# Altium PCB MainBlock.PcbDoc (part 1 of 2)
Units mm, origin at the board's own origin, x right, y up, seen from the top; angles counter-clockwise.
Board outline 152.4 x 101.6 mm, 2 copper layers (Top Layer, Bottom Layer); 89 components, 179 nets, 467 pads, 175 vias.
Unrouted connection lines stored in the file: 9.
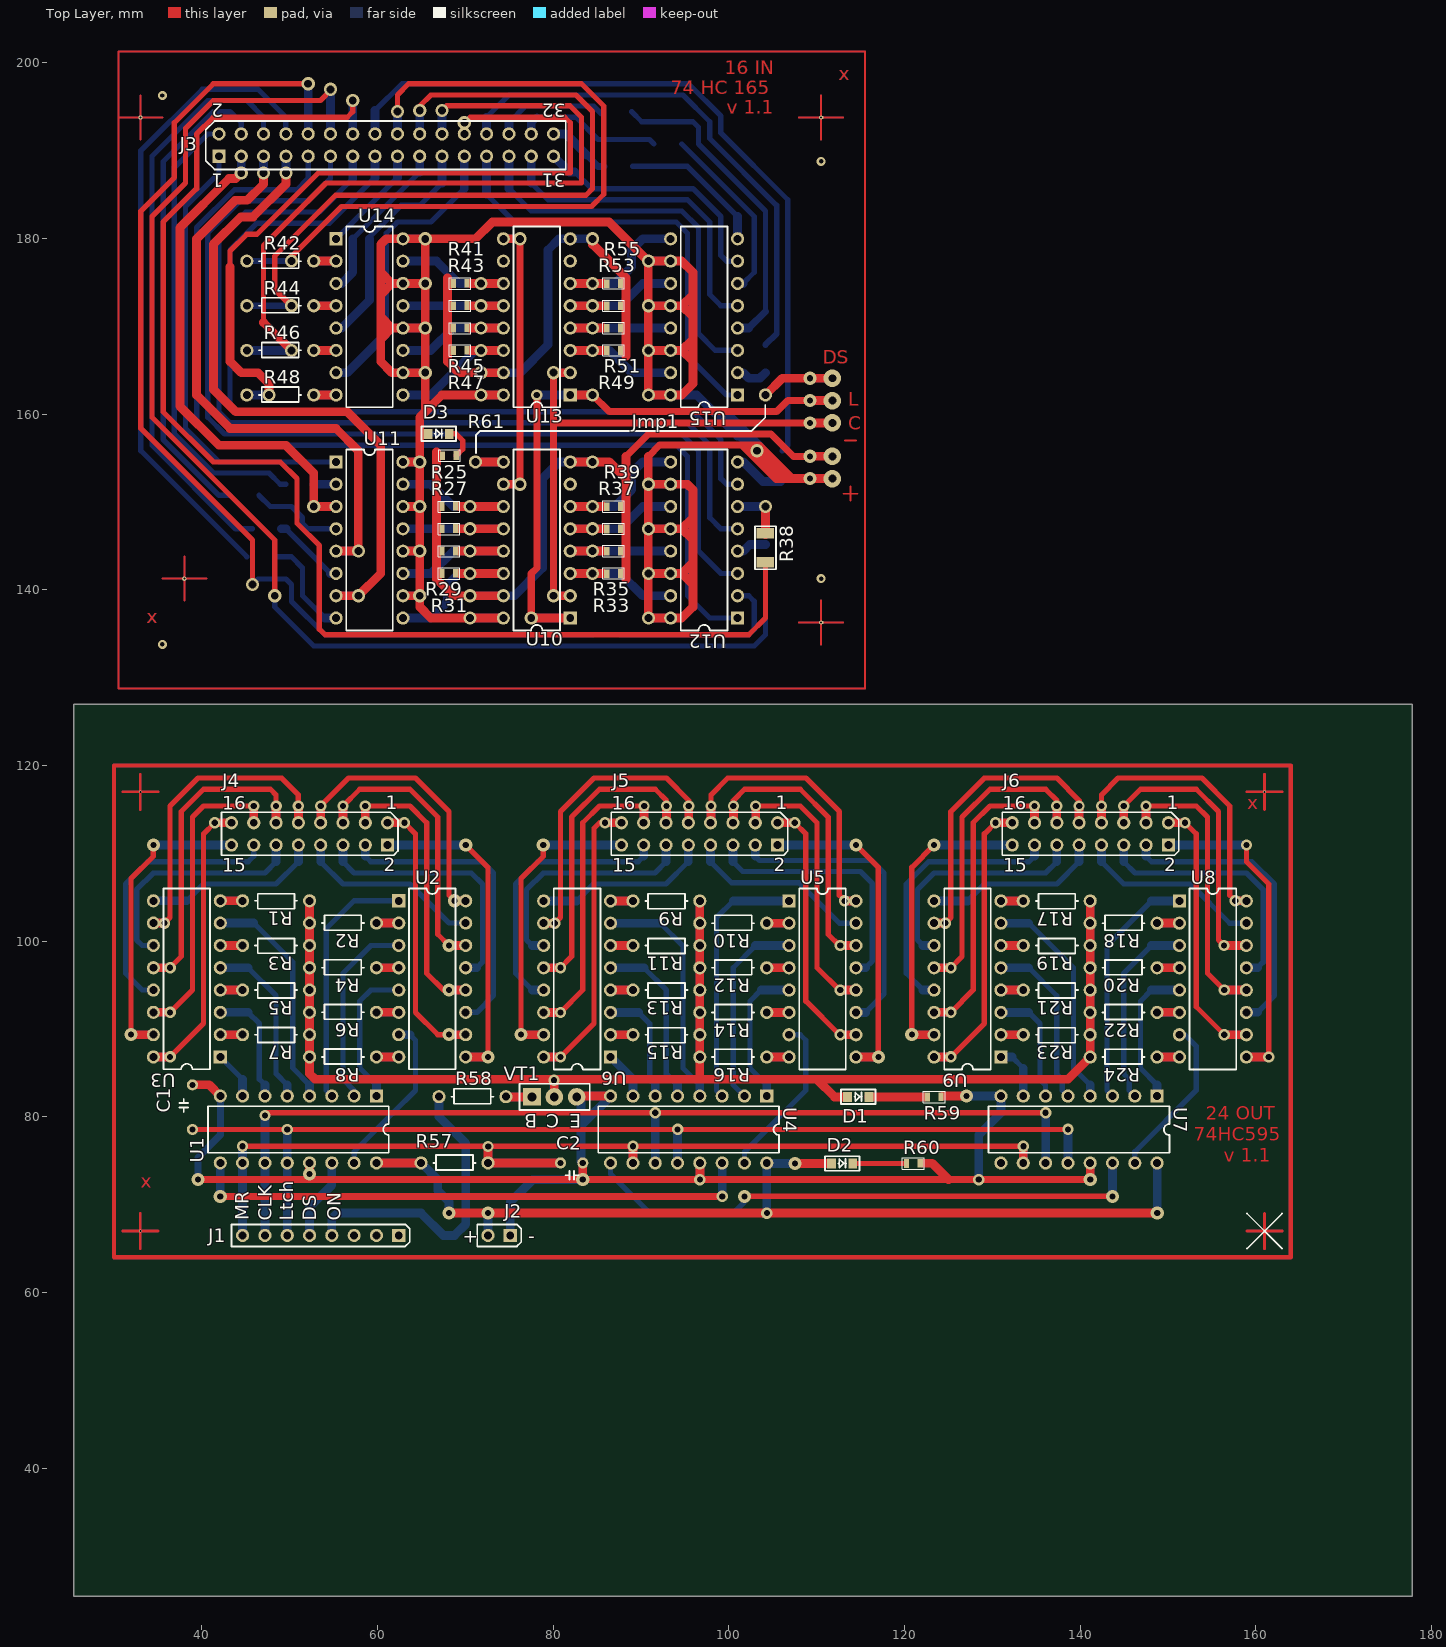
[diagram p0: Top Layer view]
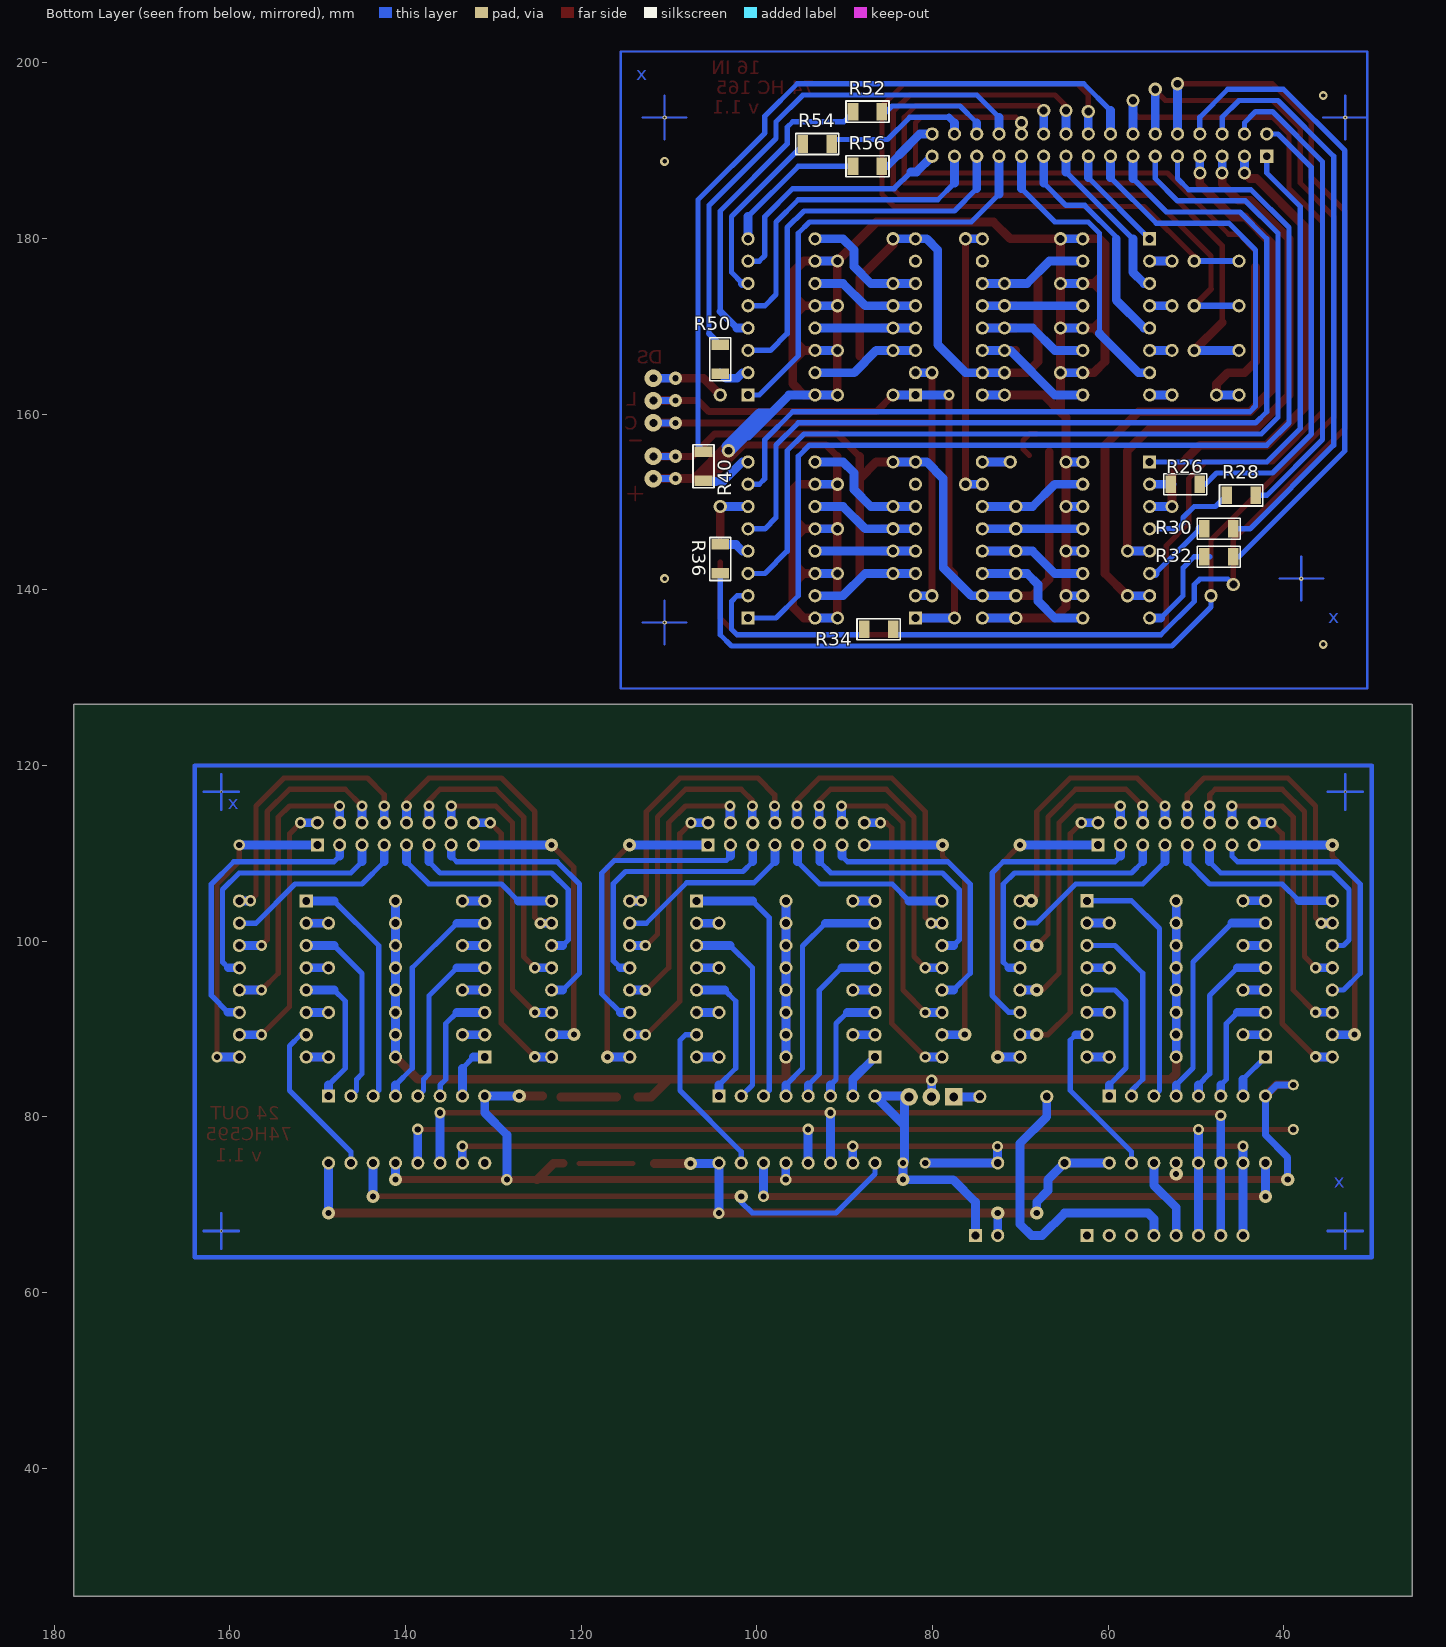
[diagram p1: Bottom Layer view, seen from below]

## Layer stack, top to bottom
Top Solder: solder mask 0.0102, Solder Resist, Dk 3.5
Top Layer: signal copper 0.0356
Dielectric 1: dielectric 0.32, FR-4, Dk 4.8
Bottom Layer: signal copper 0.0356
Bottom Solder: solder mask 0.0102, Solder Resist, Dk 3.5

## Board outline
25.4,25.4 177.8,25.4 177.8,127 25.4,127

## Design rules (kind name [scope] priority, off if disabled: settings)
Clearance [All] p1: gap=0.254
PolygonConnect [All] p1: connectstyle=Relief reliefconductorwidth=0.254 reliefentries=4 polygonreliefangle="90 Angle" airgapwidth=0.254
RoutingVias [All] p1: holewidth=0.9 width=1.5 viastyle="Through Hole" minholewidth=0.9 minwidth=1.5 maxholewidth=0.9 maxwidth=1.5
SilkToSilkClearance [All] p1: silktosilkclearance=0.1
SolderMaskExpansion [All] p1: expansion=0.12
Width [All] p1: maxlimit=1 minlimit=0.6 preferedwidth=1 minimp=50.000000 maximp=50.000000 favimp=50.000000
28 further rules are at their usual default settings.

## Classes and differential pairs
component class MainBlock: C1 C2 D1 D2 J1 J2 J4 J5 J6 R1 R2 R3 R4 R5 R6 R7 R8 R9 R10 R11 R12 R13 R14 R15 R16 R17 R18 R19 R20 R21 R22 R23 R24 R57 R58 R59 R60 U1 U2 U3 U4 U5 U6 U7 U8 U9 VT1
component class Inputs: D3 J3 Jmp1 R25 R26 R27 R28 R29 R30 R31 R32 R33 R34 R35 R36 R37 R38 R39 R40 R41 R42 R43 R44 R45 R46 R47 R48 R49 R50 R51 R52 R53 R54 R55 R56 R61 U10 U11 U12 U13 U14 U15

## Components (designator, comment, footprint, x,y, rotation, side; value= is the part's Value field where it differs from the comment)
C1 "0.01mF" "Cap (3p)" 38.925,78.565 r90 top
C2 "10mF" "Cap p2.54mm (2p)" 83.375,74.755 r180 top
D1 "Green" "LED SMD 0805 Green" 113.525,82.275 r0 top
D2 "Green" "LED SMD 0805 Green" 111.7,74.7 r0 top
D3 "Green" "LED SMD 0805 Green" 65.75,157.775 r0 top
J1 "to Arduino" "Line 2.54 x 8" 62.42,66.5 r270 top
J2 "Power Supply" "Line 2.54 x 2" 75.12,66.5 r270 top
J3 "Connector" "LINE 2.54 x 16D" 41.945,189.38 r90 top
J4 "Connector" "LINE 2.54 x 8D mirrored" 61.15,110.95 r270 top
J5 "Connector" "LINE 2.54 x 8D mirrored" 105.55,110.95 r270 top
J6 "Connector" "LINE 2.54 x 8D mirrored" 150.05,110.95 r270 top
Jmp1 "Jumper" "Jumper S 13x4" 71.155,154.575 r0 top
R1 "330 Om" "Res p7.62 (4p)" 52.26,104.6 r180 top
R2 "330 Om" "Res p7.62 (4p)" 52.26,102.06 r0 top
R3 "330 Om" "Res p7.62 (4p)" 52.26,99.52 r180 top
R4 "330 Om" "Res p7.62 (4p)" 52.26,96.98 r0 top
R5 "330 Om" "Res p7.62 (4p)" 52.26,94.44 r180 top
R6 "330 Om" "Res p7.62 (4p)" 52.26,91.9 r0 top
R7 "330 Om" "Res p7.62 (4p)" 52.26,89.36 r180 top
R8 "330 Om" "Res p7.62 (4p)" 52.26,86.82 r0 top
R9 "330 Om" "Res p7.62 (4p)" 96.7,104.59 r180 top
R10 "330 Om" "Res p7.62 (4p)" 96.7,102.05 r0 top
R11 "330 Om" "Res p7.62 (4p)" 96.7,99.51 r180 top
R12 "330 Om" "Res p7.62 (4p)" 96.7,96.97 r0 top
R13 "330 Om" "Res p7.62 (4p)" 96.7,94.43 r180 top
R14 "330 Om" "Res p7.62 (4p)" 96.7,91.89 r0 top
R15 "330 Om" "Res p7.62 (4p)" 96.7,89.35 r180 top
R16 "330 Om" "Res p7.62 (4p)" 96.7,86.81 r0 top
R17 "330 Om" "Res p7.62 (4p)" 141.15,104.59 r180 top
R18 "330 Om" "Res p7.62 (4p)" 141.15,102.05 r0 top
R19 "330 Om" "Res p7.62 (4p)" 141.15,99.51 r180 top
R20 "330 Om" "Res p7.62 (4p)" 141.15,96.97 r0 top
R21 "330 Om" "Res p7.62 (4p)" 141.15,94.43 r180 top
R22 "330 Om" "Res p7.62 (4p)" 141.15,91.89 r0 top
R23 "330 Om" "Res p7.62 (4p)" 141.15,89.35 r180 top
R24 "330 Om" "Res p7.62 (4p)" 141.15,86.81 r0 top
R25 "10 КOm" "SMD 0603 (1608)" 67.345,149.495 r0 top
R26 "220 Om" "SMD 1206 (3216)" 49.565,152.035 r0 bottom
R27 "10 КOm" "SMD 0603 (1608)" 67.345,146.955 r0 top
R28 "220 Om" "SMD 1206 (3216)" 43.215,150.765 r0 bottom
R29 "10 КOm" "SMD 0603 (1608)" 67.345,144.415 r0 top
R30 "220 Om" "SMD 1206 (3216)" 45.755,146.955 r0 bottom
R31 "10 КOm" "SMD 0603 (1608)" 67.345,141.875 r0 top
R32 "220 Om" "SMD 1206 (3216)" 45.755,143.78 r0 bottom
R33 "10 КOm" "SMD 0603 (1608)" 87.665,141.875 r180 top
R34 "220 Om" "SMD 1206 (3216)" 84.49,135.525 r0 bottom
R35 "10 КOm" "SMD 0603 (1608)" 87.665,144.415 r180 top
R36 "220 Om" "SMD 1206 (3216)" 104.175,141.875 r90 bottom
R37 "10 КOm" "SMD 0603 (1608)" 87.665,146.955 r180 top
R38 "220 Om" "SMD 1206 (3216)" 104.175,143.145 r90 top
R39 "10 КOm" "SMD 0603 (1608)" 87.665,149.495 r180 top
R40 "220 Om" "SMD 1206 (3216)" 106.08,155.725 r270 bottom
R41 "10 КOm" "SMD 0603 (1608)" 68.615,174.895 r0 top
R42 "220 Om" "Res p7.62 (4p)" 45.12,177.435 r0 top
R43 "10 КOm" "SMD 0603 (1608)" 68.615,172.355 r0 top
R44 "220 Om" "Res p7.62 (4p)" 45.12,172.355 r0 top
R45 "10 КOm" "SMD 0603 (1608)" 68.615,169.815 r0 top
R46 "220 Om" "Res p7.62 (4p)" 45.12,167.275 r0 top
R47 "10 КOm" "SMD 0603 (1608)" 68.615,167.275 r0 top
R48 "220 Om" "Res p7.62 (4p)" 45.12,162.195 r0 top
R49 "10 КOm" "SMD 0603 (1608)" 87.665,167.275 r180 top
R50 "220 Om" "SMD 1206 (3216)" 104.175,167.91 r270 bottom
R51 "10 КOm" "SMD 0603 (1608)" 87.665,169.815 r180 top
R52 "220 Om" "SMD 1206 (3216)" 85.76,194.46 r0 bottom
R53 "10 КOm" "SMD 0603 (1608)" 87.665,172.355 r180 top
R54 "220 Om" "SMD 1206 (3216)" 91.475,190.77 r0 bottom
R55 "10 КOm" "SMD 0603 (1608)" 87.665,174.895 r180 top
R56 "220 Om" "SMD 1206 (3216)" 85.76,188.23 r0 bottom
R57 "10 КOm" "Res p7.62 (4p)" 64.96,74.755 r0 top
R58 "220 Om" "Res p7.62 (4p)" 67,82.3 r0 top
R59 "330 Om" "SMD 0603 (1608)" 122.6,82.275 r0 top
R60 "330 Om" "SMD 0603 (1608)" 120.225,74.7 r0 top
R61 "330 Om" "SMD 0603 (1608)" 68.975,155.3 r180 top
U1 "SN74HC595N" DIP16 59.88,82.375 r180 top
U2 "Optocouplier" DIP16 62.42,104.6 r270 top
U3 "Optocouplier" DIP16 42.1,86.82 r90 top
U4 "SN74HC595N" DIP16 104.32,82.365 r180 top
U5 "Optocouplier" DIP16 106.86,104.59 r270 top
U6 "Optocouplier" DIP16 86.54,86.81 r90 top
U7 "SN74HC595N" DIP16 148.77,82.365 r180 top
U8 "Optocouplier" DIP16 151.31,104.59 r270 top
U9 "Optocouplier" DIP16 130.99,86.81 r90 top
U10 "SN74HC165N" DIP16 81.95,136.795 r90 top
U11 "Optocouplier" DIP16 55.28,154.575 r270 top
U12 "Optocouplier" DIP16 101,136.795 r90 top
U13 "SN74HC165N" DIP16 81.95,162.195 r90 top
U14 "Optocouplier" DIP16 55.28,179.975 r270 top
U15 "Optocouplier" DIP16 101,162.195 r90 top
VT1 "name" "Trnstr (3p) ECB" 82.675,82.275 r180 top

## Footprints (in the part's own frame and the unit in brackets; to place one, negate y for a bottom-side part, rotate by r counter-clockwise, add the part's x,y. Pads: shape width x height; smd on the part's side, far side on the other; paste and mask are expansions set on the pad)
"Cap (3p)" [mm]
  round 1.27 hole 0.7: 1(0,0) 2(5.08,0)
  silkscreen extent 2,0.5 3.5,1.5
"Cap p2.54mm (2p)" [mm]
  round 1.27 hole 0.7: 1(0,0) 2(2.54,0)
  silkscreen extent 0.5,0.9 1.99,1.92
DIP16 [mm] "DIP; 16 Leads; Row Spacing 7.62 mm; Pitch 2.54 mm"
  rect 1.5x1.5 hole 0.9: 1(0,0)
  round 1.5 hole 0.9: 2(2.54,0) 3(5.08,0) 4(7.62,0) 5(10.16,0) 6(12.7,0) 7(15.24,0) 8(17.78,0) 9(17.78,7.62) 10(15.24,7.62) 11(12.7,7.62) 12(10.16,7.62) 13(7.62,7.62) 14(5.08,7.62) 15(2.54,7.62) 16(0,7.62)
  silkscreen extent -1.41,1.16 19.19,6.46, body extent -1.87,-0.05 19.72,7.83, height 4.19
"Jumper S 13x4" [mm]
  round 1.5 hole 0.9: 1(0,0) 2(33.02,7.62)
  silkscreen extent 0.05,1.02 33,6.5, body extent -0.02,-0.02 33.05,7.61, height 0.5
"LED SMD 0805 Green" [mm]
  rect 1x1.143 smd: A(0,0) K(2.425,0)
  silkscreen extent -0.75,-0.82 3.17,0.83, body extent 0.22,-0.62 2.24,0.63, height 1.1
"Line 2.54 x 2" [mm]
  rect 1.5x1.5 hole 0.9: 1(0,0)
  round 1.5 hole 0.9: 2(0,-2.54)
  silkscreen extent -1.25,-3.75 1.25,1.25, body extent -1.25,-3.69 1.25,1.39, height 8.3
"Line 2.54 x 8" [mm]
  rect 1.5x1.5 hole 0.9: 1(0,0)
  round 1.5 hole 0.9: 2(0,-2.54) 3(0,-5.08) 4(0,-7.62) 5(0,-10.16) 6(0,-12.7) 7(0,-15.24) 8(0,-17.78)
  silkscreen extent -1.25,-19.05 1.25,1.25, body extent -1.25,-18.91 1.25,1.41, height 8.4
"LINE 2.54 x 8D mirrored" [mm]
  rect 1.5x1.5 hole 0.9: 1(0,0)
  round 1.5 hole 0.9: 2(-2.54,0) 3(0,-2.54) 4(-2.54,-2.54) 5(0,-5.08) 6(-2.54,-5.08) 7(0,-7.62) 8(-2.54,-7.62) 9(0,-10.16) 10(-2.54,-10.16) 11(0,-12.7) 12(-2.54,-12.7) 13(0,-15.24) 14(-2.54,-15.24) 15(0,-17.78) 16(-2.54,-17.78)
  silkscreen extent -3.73,-18.92 1.15,1.18, body extent -3.82,-19.04 1.26,1.28, height 8.5
"LINE 2.54 x 16D" [mm]
  rect 1.5x1.5 hole 0.9: 1(0,0)
  round 1.5 hole 0.9: 2(2.54,0) 3(0,-2.54) 4(2.54,-2.54) 5(0,-5.08) 6(2.54,-5.08) 7(0,-7.62) 8(2.54,-7.62) 9(0,-10.16) 10(2.54,-10.16) 11(0,-12.7) 12(2.54,-12.7) 13(0,-15.24) 14(2.54,-15.24) 15(0,-17.78) 16(2.54,-17.78) 17(0,-20.32) 18(2.54,-20.32) 19(0,-22.86) 20(2.54,-22.86) 21(0,-25.4) 22(2.54,-25.4) 23(0,-27.94) 24(2.54,-27.94) 25(0,-30.48) 26(2.54,-30.48) 27(0,-33.02) 28(2.54,-33.02) 29(0,-35.56) 30(2.54,-35.56) 31(0,-38.1) 32(2.54,-38.1)
  silkscreen extent -1.5,-39.5 4,1.5, body extent -1.29,-39.34 3.79,1.3, height 8.5
"Res p7.62 (4p)" [mm] "L p7.62; horisontal"
  round 1.5 hole 0.9: 1(0,0) 2(7.62,0)
  silkscreen extent 1.4,-0.8 6.2,0.9, body extent -0.3,-1 7.8,1, height 2.1
"SMD 0603 (1608)" [mm]
  rect 0.6x1 smd: 1(0,0) 2(1.575,0.025)
  silkscreen extent -0.45,-0.65 2.02,0.62, body extent 0.03,-0.4 1.58,0.45, height 0.45
"SMD 1206 (3216)" [mm]
  rect 1.2x2 smd: 1(0,0) 2(3.3,0)
  silkscreen extent -0.8,-1.2 4.1,1.2, body extent 0.05,-0.8 3.25,0.8, height 0.55
"Trnstr (3p) ECB" [mm] "L p7.62; horisontal"
  rect 2x2 hole 1: B(5.08,0)
  round 2 hole 1: C(2.54,0) E(0,0)
  silkscreen extent -1.5,-1.5 6.5,1.5

## Part data
C1 C2: library part Cap, "Capacitor"
D1 D2 D3: library part "Led SMD 0805 Green", "?2v ?20mA"
J1: library part "Connector ( 8 pin )", "8pin Connector"
J2: library part "Connector ( 2 pin )", "8pin Connector"
J3: library part "Connector Dbl ( 32 pin )", "32pin Connector"
J4 J5 J6: library part "Connector Dbl ( 16 pin )", "16pin Connector"
R1 R2 R3 R4 R5 R6 R7 R8 R9 R10 R11 R12 R13 R14 R15 R16 R17 R18 R19 R20 R21 R22 R23 R24 R25 R26 R27 R28 R29 R30 R31 R32 R33 R34 R35 R36 R37 R38 R39 R40 R41 R42 R43 R44 R45 R46 R47 R48 R49 R50 R51 R52 R53 R54 R55 R56 R57 R58 R59 R60 R61: library part Resistor
U1 U4 U7: "8-Bit Shift Register with 3-State Output Registers"
U2 U3 U5 U6 U8 U9 U11 U12 U14 U15: library part "Optocouplier 4x", "4x channel"
U10 U13: "8-Bit Parallel-Load Shift Register"
VT1: library part NPN

## Via types
v1: diameter 1.5, hole 0.9, Top Layer to Bottom Layer, 65 vias
v2: diameter 1.5, hole 0.7, Top Layer to Bottom Layer, 31 vias
v3: diameter 1.27, hole 0.711, Top Layer to Bottom Layer, 31 vias
v4: diameter 1.3, hole 0.7, Top Layer to Bottom Layer, 30 vias
v5: diameter 2, hole 0.9, Top Layer to Bottom Layer, 5 vias
v6: diameter 0.3, hole 0.2, Top Layer to Bottom Layer, 4 vias
v7: diameter 0.5, hole 0.2, Top Layer to Bottom Layer, 4 vias
v8: diameter 1, hole 0.5, Top Layer to Bottom Layer, 4 vias
v9: diameter 1.3, hole 0.7, Top Layer to Bottom Layer, tented bottom, 1 vias

## Nets (pads, with @x,y where several pads share a name; then routed paths per layer and width w, separated by ;. In a path a pad name is that pad's centre, name@x,y a point inside that pad or via, vN(x,y) a via of type N, cw(c..) or ccw(c..) an arc to the next point about the centre after c; other vN are vias at no path point)
"CLK 165": J1.3 U10.2 U13.2 | length 67.3
  Top Layer w0.8: v1(80.045,139.335) v1(80.045,164.735) ; 80.045,159.02 v2(109.255,159.02)
  Top Layer w1: v1(80.045,139.335) U10.2@81.95,139.335 ; v1(80.045,164.735) U13.2@81.95,164.735 ; v2(109.255,159.02) v5(111.795,159.02)
  Bottom Layer w0.8: v2(109.255,159.02) v5(111.795,159.02)
  Bottom Layer w1: v1(80.045,139.335) U10.2@81.95,139.335 ; v1(80.045,164.735) U13.2@81.95,164.735
"CLK 595": J1.7 U1.11 U4.11 U7.11 | length 114.3
  Top Layer w0.6: v3(47.18,80.152) 47.18,80.47 v4(91.63,80.47) v4(136.08,80.47)
  Bottom Layer w1: J1.7@47.18,66.5 U1.11@47.18,74.755 v3(47.18,80.152) ; U4.11@91.63,74.755 v4(91.63,80.47) ; U7.11@136.08,74.755 v4(136.08,80.47)
"DATA 165": J1.1 Jmp1.2 | length 10.9
  Top Layer w1: Jmp1.2@104.175,162.195 106.08,164.1 v2(109.255,164.1) v5(111.795,164.1)
  Bottom Layer w1: v2(109.255,164.1) v5(111.795,164.1)
"DATA 595": J1.5 U1.14 | length 9.3
  Bottom Layer w1: J1.5@52.26,66.5 52.26,69.675 54.8,72.215 U1.14@54.8,74.755
"DATA 595-2": U1.9 U4.14 | length 64.1
  Top Layer w0.8: v2(42.1,70.945) v4@98.615,70.945
  Bottom Layer w1: v2(42.1,70.945) U1.9@42.1,74.755 ; v4(99.25,70.945) U4.14@99.25,74.735
"DATA 595-3": U4.9 U7.14 | length 65.2
  Top Layer w0.6: v2(101.79,70.945) v2(143.7,70.945)
  Bottom Layer w0.6: U4.9@86.54,74.745 86.54,73.495 90.995,69.04 100.52,69.04 101.79,70.31 v2(101.79,70.945)
  Bottom Layer w1: v2(143.7,70.945) U7.14@143.7,74.735
GND: C1.2 C2.1 J2.1 R25.1 R27.1 R29.1 R31.1 R33.1 R35.1 R37.1 R39.1 R41.1 R43.1 R45.1 R47.1 R49.1 R51.1 R53.1 R55.1 R59.2 R60.2 R61.2 U1.8 U1.13 U4.8 U4.13 U7.8 U7.13 U10.8 U10.15 U13.8 U13.15 VT1.E | length 723.6
  Top Layer w0.2: 113.025,150.95 114.675,150.95 ; 113.2,157 114.475,157
  Top Layer w0.5: 30,64 164,64 164,120 30,120 30,64
  Top Layer w0.8: v2(39.56,72.85) v2(83.375,72.85) v4(96.71,72.85) 125.025,72.85 v4(128.46,72.85) v2(141.16,72.85) ; 88.3,155.21 90.84,157.75 104.81,157.75 107.35,155.21 v2(109.255,155.21)
  Top Layer w1: C1.2@38.925,83.645 40.83,83.645 U1.8@42.1,82.375 ; v2(52.26,73.485) U1.13@52.26,74.755 ; 66.71,155.725 66.71,141.24 68.615,139.335 v1(70.52,139.335) U10.15@74.33,139.335 ; 67.98,175.53 67.98,166.005 69.25,164.735 v1(71.79,164.735) U13.15@74.33,164.735 ; U10.8@81.95,154.575 v1(84.49,154.575) 86.395,154.575 88.3,152.67 ; VT1.E@83.185,82.365 U4.8@86.54,82.365 ; v2(83.375,72.85) C2.1@83.375,74.755 ; v1@84.49,179.34 88.3,175.53 88.3,166.64 ; 88.3,141.24 88.3,152.67 ; 88.3,155.21 88.3,152.67 ; v4(96.71,72.85) U4.13@96.71,74.735 ; v2(109.255,155.21) v5(111.795,155.21) ; R60.2@122.075,74.725 123.15,74.725 125.025,72.85 ; R59.2@124.425,82.365 v2(127.06,82.365) ; v2(141.16,72.85) U7.13@141.16,74.735
  Bottom Layer w0.8: C1.2@38.925,83.645 40.83,83.645 U1.8@42.1,82.375 42.1,77.93 39.56,75.39 v2(39.56,72.85) ; v2(52.26,73.485) U1.13@52.26,74.755 ; v2(109.255,155.21) v5(111.795,155.21)
  Bottom Layer w1: v1(70.52,139.335) U10.15@74.33,139.335 75.6,139.335 78.775,142.51 78.775,152.67 80.68,154.575 U10.8@81.95,154.575 v1(84.49,154.575) ; v1(71.79,164.735) U13.15@74.33,164.735 76.235,164.735 79.41,167.91 79.41,178.705 80.68,179.975 U13.8@81.95,179.975 v1(84.49,179.975) ; J2.1@75.12,66.5 75.12,70.31 77.66,72.85 v2(83.375,72.85) C2.1@83.375,74.755 83.185,74.945 83.185,82.365 U4.8@86.54,82.365 83.375,79.2 ; v4(96.71,72.85) U4.13@96.71,74.735 ; v2(127.06,82.365) U7.8@130.99,82.365 130.99,80.46 128.46,77.93 v4(128.46,72.85) ; v2@141.15,72.86 U7.13@141.15,74.745
I1: R25.2 U10.11 U11.15 | length 17.6
  Top Layer w1: 69.25,149.495 v1(70.52,149.495) U10.11@74.33,149.495
  Bottom Layer w1: U11.15@62.9,152.035 66.075,152.035 68.615,149.495 71.79,149.495 U10.11@74.33,149.495
I2: R27.2 U10.12 U11.13 | length 16.5
  Top Layer w1: 69.25,146.955 v1(70.52,146.955) U10.12@74.33,146.955
  Bottom Layer w1: U11.13@62.9,146.955 71.79,146.955 U10.12@74.33,146.955
I3: R29.2 U10.13 U11.11 | length 17.6
  Top Layer w1: 69.25,144.415 v1(70.52,144.415) U10.13@74.33,144.415
  Bottom Layer w1: U11.11@62.9,141.875 66.075,141.875 68.615,144.415 71.79,144.415 U10.13@74.33,144.415
I4: R31.2 U10.14 U11.9 | length 19.7
  Top Layer w1: 69.25,141.875 v1(70.52,141.875) U10.14@74.33,141.875
  Bottom Layer w1: U11.9@62.9,136.795 66.075,136.795 67.98,138.7 67.98,140.605 69.25,141.875 71.79,141.875 U10.14@74.33,141.875
I5: R33.2 U10.3 U12.15 | length 16.3
  Top Layer w1: U10.3@81.95,141.875 v1(84.49,141.875) 85.76,141.875
  Bottom Layer w1: U10.3@81.95,141.875 v1(84.49,141.875) 87.665,141.875 90.205,139.335 U12.15@93.38,139.335
I6: R35.2 U10.4 U12.13 | length 15.2
  Top Layer w1: U10.4@81.95,144.415 v1(84.49,144.415) 85.76,144.415
  Bottom Layer w1: U10.4@81.95,144.415 v1(84.49,144.415) U12.13@93.38,144.415
I7: R37.2 U10.5 U12.11 | length 16.3
  Top Layer w1: U10.5@81.95,146.955 v1(84.49,146.955) 85.76,146.955
  Bottom Layer w1: U10.5@81.95,146.955 v1(84.49,146.955) 87.665,146.955 90.205,149.495 U12.11@93.38,149.495
I8: R39.2 U10.6 U12.9 | length 18.5
  Top Layer w1: U10.6@81.95,149.495 v1(84.49,149.495) 85.76,149.495
  Bottom Layer w1: U10.6@81.95,149.495 v1(84.49,149.495) 87.03,149.495 88.935,151.4 88.935,153.305 90.205,154.575 U12.9@93.38,154.575
I9: R41.2 U13.11 U14.15 | length 16.3
  Top Layer w1: 70.52,174.895 v1(71.79,174.895) U13.11@74.33,174.895
  Bottom Layer w1: U14.15@62.9,177.435 66.71,177.435 69.25,174.895 v1(71.79,174.895) U13.11@74.33,174.895
I10: R43.2 U13.12 U14.13 | length 15.2
  Top Layer w1: 70.52,172.355 v1(71.79,172.355) U13.12@74.33,172.355
  Bottom Layer w1: U14.13@62.9,172.355 v1(71.79,172.355) U13.12@74.33,172.355
I11: R45.2 U13.13 U14.11 | length 16.3
  Top Layer w1: 70.52,169.815 v1(71.79,169.815) U13.13@74.33,169.815
  Bottom Layer w1: U14.11@62.9,167.275 66.075,167.275 68.615,169.815 v1(71.79,169.815) U13.13@74.33,169.815
I12: R47.2 U13.14 U14.9 | length 17.3
  Top Layer w1: 70.52,167.275 v1(71.79,167.275) U13.14@74.33,167.275
  Bottom Layer w1: U14.9@62.9,162.195 66.075,162.195 71.155,167.275 v1(71.79,167.275) U13.14@74.33,167.275
I13: R49.2 U13.3 U15.15 | length 16.3
  Top Layer w1: U13.3@81.95,167.275 v1(84.49,167.275) 85.76,167.275
  Bottom Layer w1: U13.3@81.95,167.275 85.76,167.275 86.395,167.275 88.935,164.735 90.205,164.735 U15.15@93.38,164.735
I14: R51.2 U13.4 U15.13 | length 15.2
  Top Layer w1: U13.4@81.95,169.815 v1(84.49,169.815) 85.76,169.815
  Bottom Layer w1: U13.4@81.95,169.815 U15.13@93.38,169.815
I15: R53.2 U13.5 U15.11 | length 16.3
  Top Layer w1: U13.5@81.95,172.355 v1(84.49,172.355) 85.76,172.355
  Bottom Layer w1: U13.5@81.95,172.355 85.76,172.355 87.665,172.355 90.205,174.895 U15.11@93.38,174.895
I16: R55.2 U13.6 U15.9 | length 18.5
  Top Layer w1: U13.6@81.95,174.895 v1(84.49,174.895) 85.76,174.895
  Bottom Layer w1: U13.6@81.95,174.895 85.76,174.895 87.03,174.895 88.935,176.8 88.935,178.705 90.205,179.975 U15.9@93.38,179.975
IA1: J3.1 U11.1 | length 51.3
  Bottom Layer w0.6: J3.1@41.945,189.38 41.945,187.475 38.135,183.665 38.135,158.385 41.945,154.575 U11.1@55.28,154.575
IA2: J3.3 U11.3 | length 59.1
  Top Layer w1: v1(44.485,187.475) 43.85,186.84 43.095,186.84 37.5,181.245 37.5,160.925 41.945,156.48 49.565,156.48 52.74,153.305 v1(52.74,149.495) U11.3@55.28,149.495
  Bottom Layer w1: v1(44.485,187.475) J3.3@44.485,189.38 ; v1(52.74,149.495) U11.3@55.28,149.495
IA3: J3.5 U11.5 | length 68.8
  Top Layer w1: v1@47.025,187.595 47.025,186.205 45.18,184.36 43.79,184.36 39.405,179.975 39.405,162.195 43.215,158.385 55.28,158.385 57.82,155.845 v1(57.82,144.415) U11.5@55.28,144.415
  Bottom Layer w1: v1(47.025,187.475) J3.5@47.025,189.38 ; U11.5@55.28,144.415 v1(57.82,144.415)
IA4: J3.7 U11.7 | length 75.9
  Top Layer w1: v1@49.565,187.595 49.565,186.205 45.815,182.455 44.425,182.455 41.31,179.34 41.31,162.83 43.85,160.29 56.55,160.29 60.36,156.48 60.36,141.875 v1(57.82,139.335) U11.7@55.28,139.335
  Bottom Layer w1: v1(49.565,187.475) J3.7@49.565,189.38 ; U11.7@55.28,139.335 v1(57.82,139.335)
IA5: J3.9 U12.1 | length 119.9
  Bottom Layer w0.6: J3.9@52.105,189.38 52.105,186.84 50.835,185.57 43.73,185.57 39.405,181.245 39.405,159.02 41.945,156.48 94.015,156.48 95.285,155.21 95.285,139.335 97.825,136.795 U12.1@101,136.795
IA6: J3.11 U12.3 | length 114.4
  Bottom Layer w0.6: J3.11@54.645,189.38 54.645,186.84 52.105,184.3 44.365,184.3 40.675,180.61 40.675,159.655 42.58,157.75 94.65,157.75 96.555,155.845 96.555,144.415 99.095,141.875 U12.3@101,141.875
IA7: J3.13 U12.5 | length 109.7
  Bottom Layer w0.6: 57.185,186.84 53.375,183.03 45,183.03 41.945,179.975 41.945,160.29 43.215,159.02 95.285,159.02 97.825,156.48 97.825,148.225 99.095,146.955 U12.5@101,146.955
  Bottom Layer w1: 57.185,186.84 J3.13@57.185,189.38
IA8: J3.15 U12.7 | length 104.2
  Bottom Layer w0.6: 59.725,186.96 54.525,181.76 46.27,181.76 43.215,178.705 43.215,160.925 43.85,160.29 95.92,160.29 99.095,157.115 99.095,152.67 99.73,152.035 U12.7@101,152.035
  Bottom Layer w1: 59.725,186.96 J3.15@59.725,189.38
IA9: J3.17 U14.1 | length 12.3
  Bottom Layer w0.6: U14.1@55.28,179.975 62.265,186.96
  Bottom Layer w1: 62.265,186.96 J3.17@62.265,189.38
IA10: J3.19 U14.3 | length 18.8
  Bottom Layer w0.6: 57.185,179.975 64.805,187.595
  Bottom Layer w1: U14.3@55.28,174.895 55.915,174.895 57.185,176.165 57.185,179.975 ; 64.805,187.595 J3.19@64.805,189.38
IA11: J3.21 U14.5 | length 26.2
  Bottom Layer w0.6: 59.09,179.975 59.09,180.196 62.679,183.785 64.805,183.785 67.345,186.325
  Bottom Layer w1: U14.5@55.28,169.815 55.915,169.815 59.09,172.99 59.09,179.975 ; 67.345,186.325 J3.21@67.345,189.38
IA12: J3.23 U14.7 | length 33.7
  Bottom Layer w0.6: 60.995,169.18 60.995,180.61 62.265,181.88 66.075,181.88 69.885,185.69
  Bottom Layer w1: U14.7@55.28,164.735 56.55,164.735 60.995,169.18 ; 69.885,185.69 J3.23@69.885,189.38
IA13: J3.25 U15.1 | length 50.6
  Bottom Layer w0.6: 72.425,185.055 75.6,181.88 94.015,181.88 95.285,180.61 95.285,166.64 99.73,162.195 U15.1@101,162.195
  Bottom Layer w1: 72.425,185.055 J3.25@72.425,189.38
IA14: J3.27 U15.3 | length 44.4
  Bottom Layer w0.6: 74.965,185.69 77.505,183.15 94.65,183.15 96.555,181.245 96.555,169.18 98.46,167.275 U15.3@101,167.275
  Bottom Layer w1: 74.965,185.69 J3.27@74.965,189.38
IA15: J3.29 U15.5 | length 37.2
  Bottom Layer w0.6: 77.505,186.325 79.41,184.42 95.285,184.42 97.825,181.88 97.825,173.625 99.095,172.355 U15.5@101,172.355
  Bottom Layer w1: 77.505,186.325 J3.29@77.505,189.38
IA16: J3.31 U15.7 | length 28.5
  Bottom Layer w0.6: 82.465,187.595 84.37,185.69 95.92,185.69 99.095,182.515 99.095,178.07 99.73,177.435 U15.7@101,177.435
  Bottom Layer w1: J3.31@80.045,189.38 81.83,187.595 82.465,187.595
IB1: J3.2 R26.1 | length 52.1
  Bottom Layer w0.6: J3.2@41.945,191.92 40.675,191.92 36.865,188.11 36.865,157.75 41.31,153.305 47.66,153.305 48.93,152.035 R26.1@49.565,152.035
IB2: J3.4 R28.1 | length 54.9
  Bottom Layer w0.6: R28.1@43.215,150.765 41.945,150.765 35.595,157.115 35.595,188.745 41.31,194.46 43.215,194.46 44.485,193.19 J3.4@44.485,191.92
IB3: J3.6 R30.1 | length 66.3
  Bottom Layer w0.6: R30.1@45.755,146.955 43.85,146.955 34.325,156.48 34.325,189.38 40.675,195.73 45.12,195.73 47.025,193.825 J3.6@47.025,191.92
IB4: J3.8 R32.1 | length 73.9
  Bottom Layer w0.6: 45.12,143.78 33.055,155.845 33.055,190.015 40.04,197 46.39,197 49.565,193.825 J3.8@49.565,191.92
IB5: J3.10 R34.1 | length 125
  Top Layer w0.6: v1(45.755,140.605) 45.755,145.685 33.055,158.385 33.055,183.15 36.865,186.96 36.865,193.19 41.31,197.635 v1(52.105,197.635)
  Bottom Layer w0.6: v1(45.755,140.605) 46.39,141.24 49.565,141.24 50.2,140.605 50.2,138.7 54.01,134.89 R34.1@84.49,134.89
  Bottom Layer w1: J3.10@52.105,191.92 v1(52.105,197.635)
IB6: J3.12 R36.1 | length 150.8
  Top Layer w0.6: v1(48.295,139.335) 48.295,145.685 34.325,159.655 34.325,182.515 38.135,186.325 38.135,192.555 41.31,195.73 53.495,195.73 54.765,197 v1(54.645,197)
  Bottom Layer w0.6: v1(48.295,139.335) 48.295,138.065 52.74,133.62 102.905,133.62 104.175,134.89 R36.1@104.175,141.875
  Bottom Layer w1: J3.12@54.645,191.92 v1(54.645,197)
IB7: J3.14 R38.1 | length 151.9
  Top Layer w0.6: v1(57.185,195.73) 57.185,194.46 56.55,193.825 41.31,193.825 39.405,191.92 39.405,185.69 35.595,181.88 35.595,160.29 41.31,154.575 48.93,154.575 50.835,152.67 50.835,147.59 53.375,145.05 53.375,135.525 54.01,134.89 102.27,134.89 104.175,136.795 R38.1@104.175,143.145
  Bottom Layer w1: J3.14@57.185,191.92 v1(57.185,195.73)
IB8: J3.16 R40.1 | length 86.3
  Bottom Layer w0.6: 59.725,194.58 62.78,197.635 95.405,197.635 99.095,193.945 99.095,192.04 106.715,184.42 106.715,156.48 R40.1@106.08,155.845
  Bottom Layer w1: J3.16@59.725,191.92 59.725,194.58
IB9: J3.18 R42.1 | length 83.7
  Top Layer w0.6: v1@50.2,177.95 55.915,183.665 84.37,183.665 85.76,185.055 85.76,195.095 83.22,197.635 63.535,197.635 62.265,196.365 v1(62.265,194.46)
  Top Layer w0.7: v1(50.2,177.435) v1@50.2,177.95
  Bottom Layer w0.7: R42.1@45.12,177.435 v1(50.2,177.435)
  Bottom Layer w1: J3.18@62.265,191.92 v1(62.265,194.46)
IB10: J3.20 R44.1 | length 83.8
  Top Layer w0.6: 48.295,174.26 48.295,178.008 55.222,184.935 83.735,184.935 84.49,185.69 84.49,194.46 82.585,196.365 66.075,196.365 64.805,195.095 v1(64.805,194.58)
  Top Layer w0.7: 48.295,174.26 v1(50.2,172.355)
  Bottom Layer w0.7: R44.1@45.12,172.355 v1(50.2,172.355)
  Bottom Layer w1: J3.20@64.805,191.92 v1(64.805,194.58)
IB11: J3.22 R46.1 | length 84.3
  Top Layer w0.6: 47.025,170.45 47.025,179.22 54.13,186.325 83.22,186.325 83.22,193.825 81.916,195.129 67.894,195.129 v1(67.345,194.58)
  Top Layer w1: 47.025,170.45 v1(50.2,167.275)
  Bottom Layer w1: R46.1@45.12,167.275 v1(50.2,167.275) ; J3.22@67.345,191.92 v1(67.345,194.58)
IB12: J3.24 R48.1 | length 82.6
  Top Layer w0.6: 43.215,176.8 43.215,178.585 45.12,180.49 46.27,180.49 53.255,187.475 81.95,187.475 81.95,193.19 81.315,193.825 70.52,193.825 v1(69.885,193.19)
  Top Layer w1: 43.215,176.8 43.215,166.005 44.485,164.735 46.39,164.735 47.66,163.465 v1(47.66,162.195)
  Bottom Layer w1: R48.1@45.12,162.195 v1(47.66,162.195)
IB13: J3.26 R50.1 | length 58.7
  Bottom Layer w0.6: 72.425,193.825 74.965,196.365 94.77,196.365 97.825,193.31 97.825,191.405 105.445,183.785 105.445,169.18
  Bottom Layer w0.7: R50.1@104.175,167.91 105.445,169.18
  Bottom Layer w1: J3.26@72.425,191.92 72.425,193.825
IB14: J3.28 R52.1 | length 13
  Bottom Layer w0.6: 74.965,193.19 76.87,195.095 84.61,195.095 R52.1@85.502,194.202
  Bottom Layer w1: J3.28@74.965,191.92 74.965,193.19
IB15: J3.30 R54.1 | length 16.8
  Bottom Layer w0.6: 78.14,193.825 82.585,193.825 85.125,191.285 90.96,191.285 R54.1@91.475,190.77
  Bottom Layer w0.8: 77.505,193.19 78.14,193.825
  Bottom Layer w1: J3.30@77.505,191.92 77.505,193.19
IB16: J3.32 R56.1 | length 7.2
  Bottom Layer w0.8: 83.855,189.5 85.125,188.23 R56.1@85.76,188.23
  Bottom Layer w1: J3.32@80.045,191.92 81.435,191.92 83.855,189.5
"LATCH 165": J1.2 U10.1 U13.1 | length 74.6
  Top Layer w0.8: v1(77.505,136.795) 77.505,141.875 78.14,142.51 v3(78.14,162.195) ; v1(84.49,162.195) 86.395,160.29 105.445,160.29 106.715,161.56 v2(109.255,161.56)
  Top Layer w1: v1(77.505,136.795) U10.1@81.95,136.795 ; U13.1@81.95,162.195 v1(84.49,162.195) ; v2(109.255,161.56) v5(111.795,161.56)
  Bottom Layer w0.8: v2(109.255,161.56) v5(111.795,161.56)
  Bottom Layer w1: v1(77.505,136.795) U10.1@81.95,136.795 ; v3(78.14,162.195) U13.1@81.95,162.195 v1(84.49,162.195)
"LATCH 595": C1.1 J1.6 U1.12 U4.12 U7.12 | length 119.4
  Top Layer w0.6: C1.1@38.925,78.565 v3(49.72,78.565) v4(94.17,78.565) v4(138.62,78.565)
  Bottom Layer w1: J1.6@49.72,66.5 U1.12@49.72,74.755 v3(49.72,78.565) ; U4.12@94.17,74.755 v4(94.17,78.565) ; U7.12@138.62,74.755 v4(138.62,78.565)
"MR 595": C2.2 J1.8 R57.2 U1.10 U4.10 U7.10 | length 126.9
  Top Layer w0.6: v3(44.64,76.66) v4(89.09,76.66) v4(133.54,76.66)
  Top Layer w1: v3@72.58,76.605 R57.2@72.58,74.755 C2.2@80.835,74.755 ; U4.10@89.09,74.755 v4(89.09,76.66) ; U7.10@133.53,74.745 v4@133.53,76.65
  Bottom Layer w1: J1.8@44.64,66.5 U1.10@44.64,74.755 v3(44.64,76.66) ; R57.2@72.58,74.755 C2.2@80.835,74.755 ; R57.2@72.6,74.775 v3(72.6,76.625) ; U4.10@89.09,74.755 v4(89.09,76.66) ; U7.10@133.54,74.755 v4(133.54,76.66)
NetD1_A: D1.A R1.1 R2.1 R3.1 R4.1 R5.1 R6.1 R7.1 R8.1 R9.1 R10.1 R11.1 R12.1 R13.1 R14.1 R15.1 R16.1 R17.1 R18.1 R19.1 R20.1 R21.1 R22.1 R23.1 R24.1 VT1.C | length 209.4
  Top Layer w1: R1.1@52.26,104.6 R8.1@52.26,86.82 52.26,84.915 52.895,84.28 96.7,84.28 ; VT1.C@80.135,82.275 v4@80.135,84.14 ; R9.1@96.7,104.59 R16.1@96.7,86.81 96.7,84.28 ; D1.A@113.525,82.275 112.03,82.275 110.025,84.28 ; R17.1@141.15,104.59 R24.1@141.15,86.81 138.62,84.28 110.025,84.28 ; 96.7,84.28 110.025,84.28
  Bottom Layer w1: R8.1@52.26,86.82 R7.1@52.26,89.36 R6.1@52.26,91.9 R5.1@52.26,94.44 R4.1@52.26,96.98 R3.1@52.26,99.52 R2.1@52.26,102.06 R1.1@52.26,104.6 ; VT1.C@80.1,82.31 v4(80.1,84.175) ; R16.1@96.7,86.81 R15.1@96.7,89.35 R14.1@96.7,91.89 R13.1@96.7,94.43 R12.1@96.7,96.97 R11.1@96.7,99.51 R10.1@96.7,102.05 R9.1@96.7,104.59 ; R24.1@141.15,86.81 R17.1@141.15,104.59
NetD1_K: D1.K R59.1 | length 6.3
  Top Layer w1: D1.K@115.95,82.275 122.3,82.275
NetD2_K: D2.K R60.1 | length 6.1
  Top Layer w0.6: D2.K@114.125,74.7 R60.1@120.225,74.7
NetD3_K: D3.K R61.1 | length 3.8
  Top Layer w0.6: D3.K@68.175,157.775 68.925,157.775 69.7,157 69.7,156.025 R61.1@68.975,155.3
NetJ1_4: J1.4 R58.1 | length 34.8
  Bottom Layer w1: J1.4@54.8,66.5 54.8,68.405 55.435,69.04 64.96,69.04 67.5,66.5 68.77,66.5 70.04,67.77 70.04,76.985 67,80.025 R58.1@67,82.3
NetJmp1_1: Jmp1.1 U10.9 | length 6.3
  Top Layer w1: Jmp1.1@71.155,154.575 U10.9@74.33,154.575
  Bottom Layer w1: Jmp1.1@71.155,154.575 U10.9@74.33,154.575
NetR1_2: R1.2 U3.8 | length 5.1
  Top Layer w1: U3.8@42.1,104.6 R1.2@44.64,104.6
  Bottom Layer w1: U3.8@42.1,104.6 R1.2@44.64,104.6
NetR2_2: R2.2 U2.2 | length 5.1
  Top Layer w1: R2.2@59.88,102.06 U2.2@62.42,102.06
  Bottom Layer w1: R2.2@59.88,102.06 U2.2@62.42,102.06
NetR3_2: R3.2 U3.6 | length 5.1
  Top Layer w1: U3.6@42.1,99.52 R3.2@44.64,99.52
  Bottom Layer w1: U3.6@42.1,99.52 R3.2@44.64,99.52
NetR4_2: R4.2 U2.4 | length 5.1
  Top Layer w1: R4.2@59.88,96.98 U2.4@62.42,96.98
  Bottom Layer w1: R4.2@59.88,96.98 U2.4@62.42,96.98
NetR5_2: R5.2 U3.4 | length 5.1
  Top Layer w1: U3.4@42.1,94.44 R5.2@44.64,94.44
  Bottom Layer w1: U3.4@42.1,94.44 R5.2@44.64,94.44
NetR6_2: R6.2 U2.6 | length 5.1
  Top Layer w1: R6.2@59.88,91.9 U2.6@62.42,91.9
  Bottom Layer w1: R6.2@59.88,91.9 U2.6@62.42,91.9
NetR7_2: R7.2 U3.2 | length 5.1
  Top Layer w1: U3.2@42.1,89.36 R7.2@44.64,89.36
  Bottom Layer w1: U3.2@42.1,89.36 R7.2@44.64,89.36
NetR8_2: R8.2 U2.8 | length 5.1
  Top Layer w1: R8.2@59.88,86.82 U2.8@62.42,86.82
  Bottom Layer w1: R8.2@59.88,86.82 U2.8@62.42,86.82
NetR9_2: R9.2 U6.8 | length 5.1
  Top Layer w1: U6.8@86.54,104.59 R9.2@89.08,104.59
  Bottom Layer w1: U6.8@86.54,104.59 R9.2@89.08,104.59
NetR10_2: R10.2 U5.2 | length 5.1
  Top Layer w1: R10.2@104.32,102.05 U5.2@106.86,102.05
  Bottom Layer w1: R10.2@104.32,102.05 U5.2@106.86,102.05
NetR11_2: R11.2 U6.6 | length 5.1
  Top Layer w1: U6.6@86.54,99.51 R11.2@89.08,99.51
  Bottom Layer w1: U6.6@86.54,99.51 R11.2@89.08,99.51
NetR12_2: R12.2 U5.4 | length 5.1
  Top Layer w1: R12.2@104.32,96.97 U5.4@106.86,96.97
  Bottom Layer w1: R12.2@104.32,96.97 U5.4@106.86,96.97
NetR13_2: R13.2 U6.4 | length 5.1
  Top Layer w1: U6.4@86.54,94.43 R13.2@89.08,94.43
  Bottom Layer w1: U6.4@86.54,94.43 R13.2@89.08,94.43
NetR14_2: R14.2 U5.6 | length 5.1
  Top Layer w1: R14.2@104.32,91.89 U5.6@106.86,91.89
  Bottom Layer w1: R14.2@104.32,91.89 U5.6@106.86,91.89
NetR15_2: R15.2 U6.2 | length 5.1
  Top Layer w1: U6.2@86.54,89.35 R15.2@89.08,89.35
  Bottom Layer w1: U6.2@86.54,89.35 R15.2@89.08,89.35
NetR16_2: R16.2 U5.8 | length 5.1
  Top Layer w1: R16.2@104.32,86.81 U5.8@106.86,86.81
  Bottom Layer w1: R16.2@104.32,86.81 U5.8@106.86,86.81
NetR17_2: R17.2 U9.8 | length 5.1
  Top Layer w1: U9.8@130.99,104.59 R17.2@133.53,104.59
  Bottom Layer w1: U9.8@130.99,104.59 R17.2@133.53,104.59